# Altium PCB micropcb.PcbDoc
Units mm, origin at the board's own origin, x right, y up, seen from the top; angles counter-clockwise.
Board outline 40 x 30 mm, 2 copper layers (Top Layer, Bottom Layer); 21 components, 18 nets, 50 pads, 0 vias.
Unrouted connection lines stored in the file: 29.
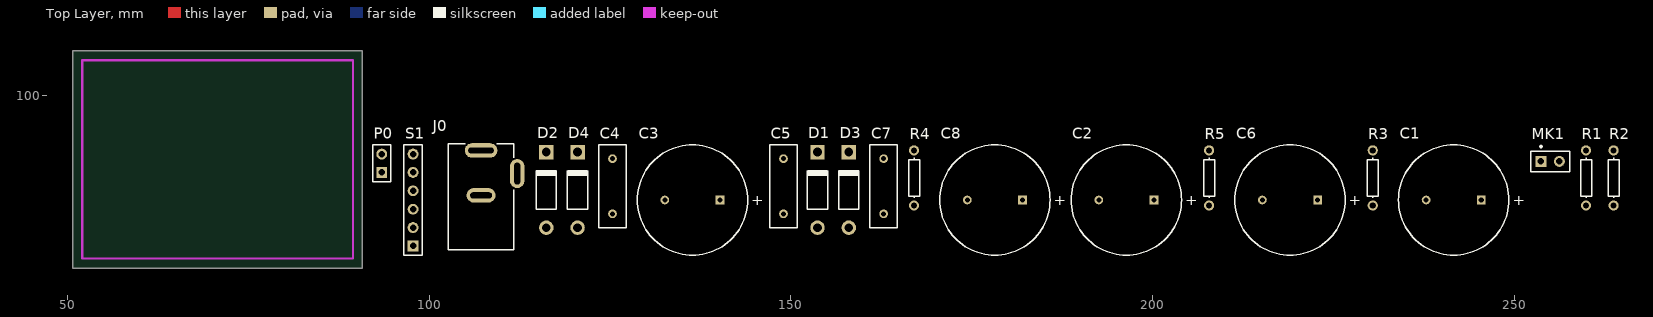
[diagram p0: Top Layer view]
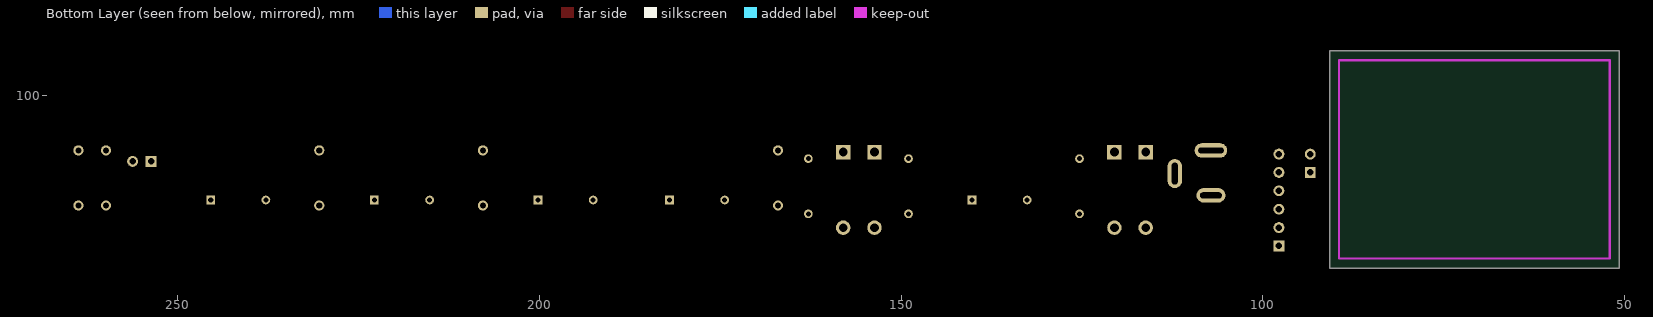
[diagram p1: Bottom Layer view, seen from below]

## Layer stack, top to bottom
Top Layer: signal copper 0.0356
Dielectric: dielectric 0.32, FR-4, Dk 4.8
Bottom Layer: signal copper 0.0356

## Board outline
50.8,76.2 90.8,76.2 90.8,106.2 50.8,106.2

## Design rules (kind name [scope] priority, off if disabled: settings)
Clearance [All] p1: gap=0.3
PolygonConnect [All] p1: connectstyle=Relief reliefconductorwidth=0.254 reliefentries=4 polygonreliefangle="90 Angle"
RoomDefinition micro_schem [InComponentClass('micro_schem')] p1: confinementstyle=ConfineIn formatcopy=TRUE lockcomponents=FALSE outline 91.948,77.47 266.065,77.47 266.065,96.012 91.948,96.012
RoutingVias [All] p1: holewidth=0.8 width=1.6 viastyle="Through Hole" minholewidth=0.711 minwidth=1.27 maxholewidth=0.711 maxwidth=1.27
SilkscreenOverComponentPads [All] p1: minsilkscreentomaskgap=0.254
SolderMaskExpansion [All] p1: expansion=0.102
Width [All] p1: maxlimit=0.3 minlimit=0.3 preferedwidth=0.3
27 further rules are at their usual default settings.

## Components (designator, comment, footprint, x,y, rotation, side; value= is the part's Value field where it differs from the comment)
C1 "" RB7.6-15 241.554,85.598 r0 top
C2 "" RB7.6-15 196.342,85.598 r0 top
C3 "" RB7.6-15 136.398,85.598 r0 top
C4 "" RAD-0.3 125.349,87.503 r90 top
C5 "" RAD-0.3 148.971,87.503 r90 top
C6 "" RB7.6-15 218.948,85.598 r0 top
C7 "" RAD-0.3 162.814,87.503 r90 top
C8 "" RB7.6-15 178.181,85.598 r0 top
D1 "Diode 1N4007" DIO10.46-5.3x2.8 153.67,86.995 r90 top
D2 "Diode 1N4007" DIO10.46-5.3x2.8 116.205,86.995 r90 top
D3 "Diode 1N4007" DIO10.46-5.3x2.8 157.988,86.995 r90 top
D4 "Diode 1N4007" DIO10.46-5.3x2.8 120.523,86.995 r90 top
J0 "PWR2.1" KLD-0202 107.188,78.74 r90 top
MK1 "Mic2" PIN2 253.619,90.932 r0 top
P0 "OUTPUT" HDR1X2 93.472,89.408 r90 top
R1 "" AXIAL-0.3 259.842,88.646 r90 top
R2 "" AXIAL-0.3 263.652,88.646 r90 top
R3 "" AXIAL-0.3 230.378,88.646 r90 top
R4 "" AXIAL-0.3 167.005,88.646 r90 top
R5 "" AXIAL-0.3 207.772,88.646 r90 top
S1 "Header 6" HDR1X6 97.79,79.248 r90 top

## Footprints (in the part's own frame and the unit in brackets; to place one, negate y for a bottom-side part, rotate by r counter-clockwise, add the part's x,y. Pads: shape width x height; smd on the part's side, far side on the other; paste and mask are expansions set on the pad)
AXIAL-0.3 [mm] "Axial Device, Thru-Hole; 2 Leads; 0.3 in Pin Spacing"
  round 1.4 hole 0.85: 1(-3.81,0) 2(3.81,0)
  silkscreen extent -2.77,-0.76 2.77,0.76
DIO10.46-5.3x2.8 [mm] "Diode, Axial; Body 5.2 x 2.7 mm (LxDia. max), Lead Dia. 0.86 mm (max)"
  round 2 hole 1.2: 1(-5.23,0)
  rect 2x2 hole 1.2: 2(5.23,0)
  silkscreen extent -2.65,-1.4 2.75,1.4
HDR1X2 [mm] "Connector; Header; 2 Position"
  rect 1.5x1.5 hole 0.9: 1(0,0)
  round 1.5 hole 0.9: 2(2.54,0)
  silkscreen extent -1.27,-1.27 3.81,1.27
HDR1X6 [mm] "Connector; Header; 6 Position"
  rect 1.5x1.5 hole 0.9: 1(0,0)
  round 1.5 hole 0.9: 2(2.54,0) 3(5.08,0) 4(7.62,0) 5(10.16,0) 6(12.7,0)
  silkscreen extent -1.27,-1.27 13.97,1.27
KLD-0202 [mm] "DC Power Jack, 2.5mm, KLD Series, PCB Mount"
  oval 2x4.5 all layers, no hole: 1(13.7,0)
  oval 1.5x4.5 hole 0.8 slot 3.5 at 90 deg: 1A(13.7,0)
  oval 2x4 all layers, no hole: 2(7.5,0)
  oval 1.5x4 hole 0.8 slot 3 at 90 deg: 2A(7.5,0)
  oval 4x2 all layers, no hole: 3(10.5,-5)
  oval 4x1.5 hole 0.8 slot 3 at 0 deg: 3A(10.5,-5)
  silkscreen extent 0,-4.5 14.6,4.5
PIN2 [mm] "Photosensitive Diode; 2 Leads"
  rect 1.5x1.5 hole 0.9: 1(0,0)
  round 1.5 hole 0.9: 2(2.54,0)
  silkscreen extent -1.4,-1.4 3.94,2.17
RAD-0.3 [mm] "Radial Cap, Thru-Hole; 2 Leads; 0.3 in Pin Spacing"
  round 1.2 hole 0.7: 1(-3.81,0) 2(3.81,0)
  silkscreen extent -5.71,-1.91 5.71,1.91
RB7.6-15 [mm] "Polarized Capacitor (Radial); 2 Leads"
  rect 1.2x1.2 hole 0.7: 1(3.81,0)
  round 1.2 hole 0.7: 2(-3.81,0)
  silkscreen extent -7.62,-7.62 7.62,7.62

## Part data
C1 C2 C3 C6 C8: library part "Cap Pol1", "Polarized Capacitor (Radial)"
C4 C5 C7: library part Cap, "Capacitor"
D1 D2 D3 D4: "1 Amp General Purpose Rectifier"
J0: library part PWR2.5, "Low Voltage Power Supply Connector"
MK1: "Microphone"
P0: library part "Header 2", "Header, 2-Pin"
R1 R2 R3 R4 R5: library part Res1, "Resistor"
S1: "Header, 6-Pin"

## Nets (pads, with @x,y where several pads share a name; then routed paths per layer and width w, separated by ;. In a path a pad name is that pad's centre, name@x,y a point inside that pad or via, vN(x,y) a via of type N, cw(c..) or ccw(c..) an arc to the next point about the centre after c; other vN are vias at no path point)
GND: C3.2 C4.1 C7.1 C8.2 D2.2 D4.1 J0.1 J0.1A MK1.1 P0.2 R4.1 S1.5 S1.6
NetC1_1: C1.1 MK1.2 R1.1
NetC1_2: C1.2 R3.2
NetC2_1: C2.1
NetC2_2: C2.2
NetC3_1: C3.1
NetC4_2: C4.2 C5.1
NetC5_2: C5.2 R5.1
NetC6_1: C6.1 R5.2
NetC6_2: C6.2 D1.1 D3.2 S1.1
NetD1_2: D1.2 D2.1
NetD3_1: D3.1 D4.2
NetJ0_2: J0.2 J0.2A S1.2
NetJ0_3: J0.3 J0.3A
NetP0_1: P0.1 S1.3
NetR1_2: R1.2 R2.1
NetR3_1: R3.1 R4.2
VCC: C7.2 C8.1 R2.2 S1.4

## Keep-outs
Keep-Out Layer:
  lines w0.3: 52.1,77.5 52.1,104.9 89.5,104.9 89.5,77.5 52.1,77.5

## Silkscreen, mask and mechanical layers (free items; w line width, h text height)
Drill Drawing:
  text ".LEGEND" at 95.88,81.28 h1.52
  text "Drill Drawing." at 95.88,78.74 h1.52

## Dimensions
52.1,77.5 to 52.1,104.9 on Mechanical 1
52.1,77.5 to 89.5,77.5 on Mechanical 1

## Text inside footprints (layer, text, board x,y; h text height)
C1: Top Overlay "+" at 249.686,84.861 h1.5
C2: Top Overlay "+" at 204.474,84.861 h1.5
C3: Top Overlay "+" at 144.53,84.861 h1.5
C6: Top Overlay "+" at 227.08,84.861 h1.5
C8: Top Overlay "+" at 186.313,84.861 h1.5
J0: Mechanical 1 "Alert PCB fab to slot details" at 101.122,79.026 h0.3 r90; Mechanical 1 "Assign keep-out area to slot" at 100.622,79.026 h0.3 r90; Mechanical 1 "Mech 1 - Slot cut-out" at 101.622,79.026 h0.3 r90; Mechanical 1 "Mech 2 - Clearance, move to internal plane if present" at 102.122,79.026 h0.3 r90